# Altium PCB Skayboard.PcbDoc (part 1 of 3)
Units mil, origin at the board's own origin, x right, y up, seen from the top; angles counter-clockwise.
Board outline 13972.57 x 4222.54 mil, 2 copper layers (Top Layer, Bottom Layer); 328 components, 109 nets, 864 pads, 207 vias.
Unrouted connection lines stored in the file: 225.
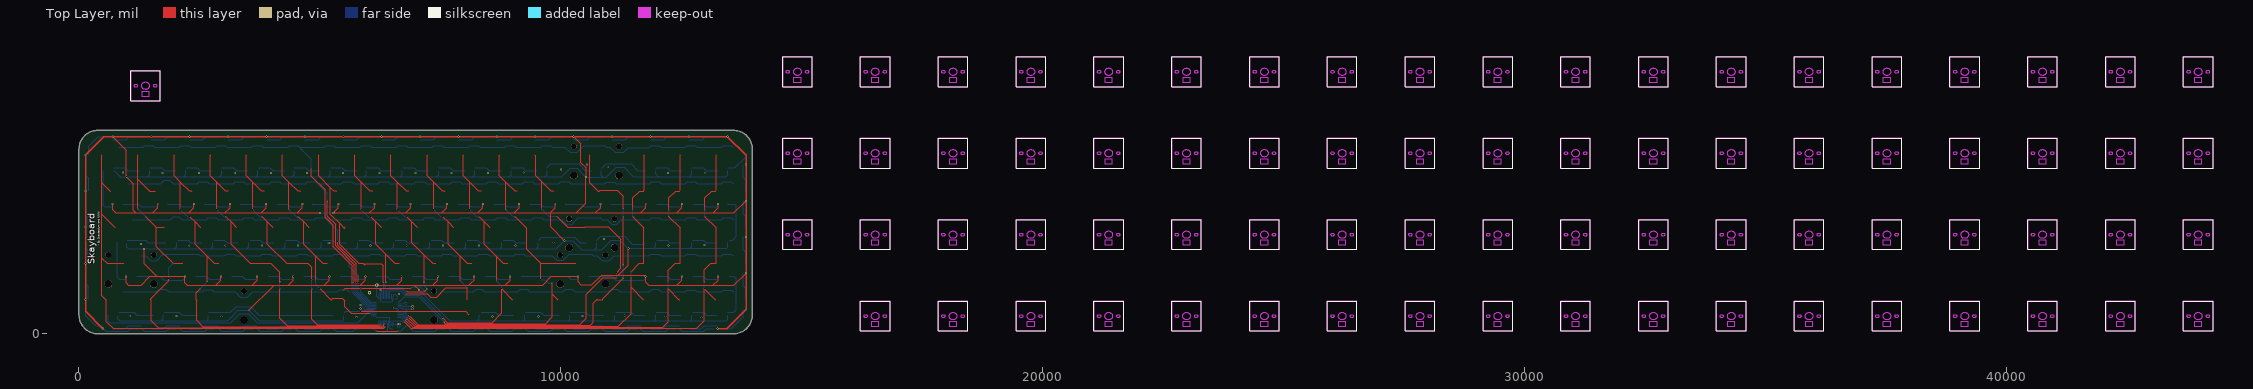
[diagram p0: Top Layer view]
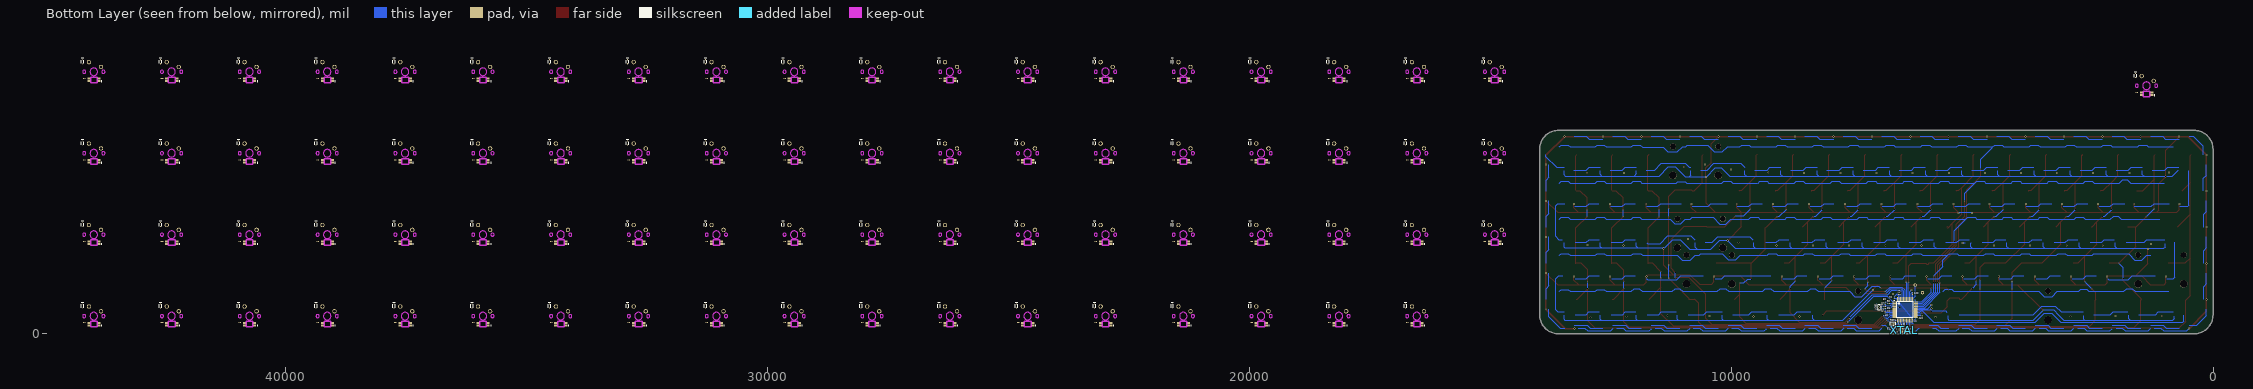
[diagram p1: Bottom Layer view, seen from below]

## Layer stack, top to bottom
Top Solder: solder mask 0.4, Solder Resist, Dk 3.5
Top Layer: signal copper 1.4
Dielectric 1: dielectric 12.6, FR-4, Dk 4.8
Bottom Layer: signal copper 1.4
Bottom Solder: solder mask 0.4, Solder Resist, Dk 3.5

## Board outline
58.09,188.06 42.95,215.02 30.04,243.12 19.35,272.1 10.94,301.83 4.92,332.15 1.29,362.86 0.04,393.78 0.09,3828.78 1.29,3859.71 4.92,3890.42 10.94,3920.74 19.35,3950.47 30.04,3979.52 42.95,4007.55 58.09,4034.52 75.23,4060.23 94.38,4084.52 115.38,4107.2 138.06,4128.22 162.37,4147.36 188.08,4164.52 215.04,4179.64 243.09,4192.55 272.12,4203.26 301.85,4211.65 332.18,4217.67 362.89,4221.33 393.81,4222.55 13578.87,4222.51 13609.73,4221.33 13640.44,4217.67 13670.75,4211.65 13700.52,4203.26 13729.5,4192.55 13757.57,4179.64 13784.53,4164.52 13810.24,4147.36 13834.5,4128.22 13857.25,4107.2 13878.24,4084.52 13897.33,4060.23 13914.53,4034.52 13929.69,4007.55 13942.61,3979.52 13953.31,3950.47 13961.62,3920.74 13967.76,3890.42 13971.35,3859.71 13972.61,3828.78 13972.61,393.78 13971.35,362.86 13967.76,332.15 13961.62,301.83 13953.31,272.1 13942.61,243.12 13929.69,215.02 13914.53,188.06 13897.33,162.34 13878.24,138.09 13857.25,115.36 13834.5,94.36 13810.24,75.21 13784.53,58.06 13757.57,42.93 13729.5,30.02 13700.52,19.33 13670.75,10.92 13640.44,4.9 13609.73,1.26 13578.87,0.01 393.81,0.07 362.89,1.26 332.18,4.9 301.85,10.92 272.12,19.33 243.09,30.02 215.04,42.93 188.08,58.06 162.37,75.21 138.06,94.36 115.38,115.36 94.38,138.09 75.23,162.34

## Design rules (kind name [scope] priority, off if disabled: settings)
BoardOutlineClearance [All] p1: gap=10 ignorepadtopadclearanceinfootprint=FALSE except(-1: Arc-OutlineEdge; 0: Arc-SplitContinuation Track-SplitContinuation SMDPad-SplitContinuation THPad-SplitContinuation Via-SplitContinuation Fill-SplitContinuation Poly-SplitContinuation Region-SplitContinuation Text-SplitContinuation)
Clearance [All] p1: gap=10 ignorepadtopadclearanceinfootprint=FALSE except(0: Arc-Hole Track-Hole SMDPad-Hole THPad-Hole Via-Hole Fill-Hole Poly-Hole Region-Hole Text-Hole)
HoleSize [All] p1: absolutevalues=TRUE maxlimit=600 minlimit=5 maxpercent=80.000 minpercent=20.000
PolygonConnect [All] p1: connectstyle=Relief reliefconductorwidth=10 reliefentries=4 polygonreliefangle="90 Angle" airgapwidth=10
RoomDefinition SKEY1 [InComponentClass('SKEY1')] p1: confinementstyle=ConfineIn formatcopy=TRUE lockcomponents=FALSE outline 1054.6,4824.66 1709.53,4824.66 1709.53,5477.24 1054.6,5477.24
RoomDefinition SKEY2 [InComponentClass('SKEY2')] p2: confinementstyle=ConfineIn formatcopy=TRUE lockcomponents=FALSE outline 16195.45,44.44 16850.38,44.44 16850.38,697.02 16195.45,697.02
RoomDefinition SKEY3 [InComponentClass('SKEY3')] p3: confinementstyle=ConfineIn formatcopy=TRUE lockcomponents=FALSE outline 17810.15,44.44 18465.07,44.44 18465.07,697.02 17810.15,697.02
RoomDefinition SKEY4 [InComponentClass('SKEY4')] p4: confinementstyle=ConfineIn formatcopy=TRUE lockcomponents=FALSE outline 19424.84,44.44 20079.77,44.44 20079.77,697.02 19424.84,697.02
RoomDefinition SKEY5 [InComponentClass('SKEY5')] p5: confinementstyle=ConfineIn formatcopy=TRUE lockcomponents=FALSE outline 21039.53,44.44 21694.46,44.44 21694.46,697.02 21039.53,697.02
RoomDefinition SKEY6 [InComponentClass('SKEY6')] p6: confinementstyle=ConfineIn formatcopy=TRUE lockcomponents=FALSE outline 22654.23,44.44 23309.15,44.44 23309.15,697.02 22654.23,697.02
RoomDefinition SKEY7 [InComponentClass('SKEY7')] p7: confinementstyle=ConfineIn formatcopy=TRUE lockcomponents=FALSE outline 24268.92,44.44 24923.85,44.44 24923.85,697.02 24268.92,697.02
RoomDefinition SKEY8 [InComponentClass('SKEY8')] p8: confinementstyle=ConfineIn formatcopy=TRUE lockcomponents=FALSE outline 25883.62,44.44 26538.54,44.44 26538.54,697.02 25883.62,697.02
RoomDefinition SKEY9 [InComponentClass('SKEY9')] p9: confinementstyle=ConfineIn formatcopy=TRUE lockcomponents=FALSE outline 27498.31,44.44 28153.24,44.44 28153.24,697.02 27498.31,697.02
RoomDefinition SKEY10 [InComponentClass('SKEY10')] p10: confinementstyle=ConfineIn formatcopy=TRUE lockcomponents=FALSE outline 29113,44.44 29767.93,44.44 29767.93,697.02 29113,697.02
RoomDefinition SKEY11 [InComponentClass('SKEY11')] p11: confinementstyle=ConfineIn formatcopy=TRUE lockcomponents=FALSE outline 30727.7,44.44 31382.62,44.44 31382.62,697.02 30727.7,697.02
RoomDefinition SKEY12 [InComponentClass('SKEY12')] p12: confinementstyle=ConfineIn formatcopy=TRUE lockcomponents=FALSE outline 32342.39,44.44 32997.32,44.44 32997.32,697.02 32342.39,697.02
RoomDefinition SKEY13 [InComponentClass('SKEY13')] p13: confinementstyle=ConfineIn formatcopy=TRUE lockcomponents=FALSE outline 33957.08,44.44 34612.01,44.44 34612.01,697.02 33957.08,697.02
RoomDefinition SKEY14 [InComponentClass('SKEY14')] p14: confinementstyle=ConfineIn formatcopy=TRUE lockcomponents=FALSE outline 35571.78,44.44 36226.7,44.44 36226.7,697.02 35571.78,697.02
RoomDefinition SKEY15 [InComponentClass('SKEY15')] p15: confinementstyle=ConfineIn formatcopy=TRUE lockcomponents=FALSE outline 37186.47,44.44 37841.4,44.44 37841.4,697.02 37186.47,697.02
RoomDefinition SKEY16 [InComponentClass('SKEY16')] p16: confinementstyle=ConfineIn formatcopy=TRUE lockcomponents=FALSE outline 38801.16,44.44 39456.09,44.44 39456.09,697.02 38801.16,697.02
RoomDefinition SKEY17 [InComponentClass('SKEY17')] p17: confinementstyle=ConfineIn formatcopy=TRUE lockcomponents=FALSE outline 40415.86,44.44 41070.78,44.44 41070.78,697.02 40415.86,697.02
RoomDefinition SKEY18 [InComponentClass('SKEY18')] p18: confinementstyle=ConfineIn formatcopy=TRUE lockcomponents=FALSE outline 42030.55,44.44 42685.48,44.44 42685.48,697.02 42030.55,697.02
RoomDefinition SKEY19 [InComponentClass('SKEY19')] p19: confinementstyle=ConfineIn formatcopy=TRUE lockcomponents=FALSE outline 43645.25,44.44 44300.17,44.44 44300.17,697.02 43645.25,697.02
RoomDefinition SKEY20 [InComponentClass('SKEY20')] p20: confinementstyle=ConfineIn formatcopy=TRUE lockcomponents=FALSE outline 14580.76,1734.39 15235.69,1734.39 15235.69,2386.97 14580.76,2386.97
RoomDefinition SKEY21 [InComponentClass('SKEY21')] p21: confinementstyle=ConfineIn formatcopy=TRUE lockcomponents=FALSE outline 16195.45,1734.39 16850.38,1734.39 16850.38,2386.97 16195.45,2386.97
RoomDefinition SKEY22 [InComponentClass('SKEY22')] p22: confinementstyle=ConfineIn formatcopy=TRUE lockcomponents=FALSE outline 17810.15,1734.39 18465.07,1734.39 18465.07,2386.97 17810.15,2386.97
RoomDefinition SKEY23 [InComponentClass('SKEY23')] p23: confinementstyle=ConfineIn formatcopy=TRUE lockcomponents=FALSE outline 19424.84,1734.39 20079.77,1734.39 20079.77,2386.97 19424.84,2386.97
RoomDefinition SKEY24 [InComponentClass('SKEY24')] p24: confinementstyle=ConfineIn formatcopy=TRUE lockcomponents=FALSE outline 21039.53,1734.39 21694.46,1734.39 21694.46,2386.97 21039.53,2386.97
RoomDefinition SKEY25 [InComponentClass('SKEY25')] p25: confinementstyle=ConfineIn formatcopy=TRUE lockcomponents=FALSE outline 22654.23,1734.39 23309.15,1734.39 23309.15,2386.97 22654.23,2386.97
RoomDefinition SKEY26 [InComponentClass('SKEY26')] p26: confinementstyle=ConfineIn formatcopy=TRUE lockcomponents=FALSE outline 24268.92,1734.39 24923.85,1734.39 24923.85,2386.97 24268.92,2386.97
RoomDefinition SKEY27 [InComponentClass('SKEY27')] p27: confinementstyle=ConfineIn formatcopy=TRUE lockcomponents=FALSE outline 25883.62,1734.39 26538.54,1734.39 26538.54,2386.97 25883.62,2386.97
RoomDefinition SKEY28 [InComponentClass('SKEY28')] p28: confinementstyle=ConfineIn formatcopy=TRUE lockcomponents=FALSE outline 27498.31,1734.39 28153.24,1734.39 28153.24,2386.97 27498.31,2386.97
RoomDefinition SKEY29 [InComponentClass('SKEY29')] p29: confinementstyle=ConfineIn formatcopy=TRUE lockcomponents=FALSE outline 29113,1734.39 29767.93,1734.39 29767.93,2386.97 29113,2386.97
RoomDefinition SKEY30 [InComponentClass('SKEY30')] p30: confinementstyle=ConfineIn formatcopy=TRUE lockcomponents=FALSE outline 30727.7,1734.39 31382.62,1734.39 31382.62,2386.97 30727.7,2386.97
RoomDefinition SKEY31 [InComponentClass('SKEY31')] p31: confinementstyle=ConfineIn formatcopy=TRUE lockcomponents=FALSE outline 32342.39,1734.39 32997.32,1734.39 32997.32,2386.97 32342.39,2386.97
RoomDefinition SKEY32 [InComponentClass('SKEY32')] p32: confinementstyle=ConfineIn formatcopy=TRUE lockcomponents=FALSE outline 33957.08,1734.39 34612.01,1734.39 34612.01,2386.97 33957.08,2386.97
RoomDefinition SKEY33 [InComponentClass('SKEY33')] p33: confinementstyle=ConfineIn formatcopy=TRUE lockcomponents=FALSE outline 35571.78,1734.39 36226.7,1734.39 36226.7,2386.97 35571.78,2386.97
RoomDefinition SKEY34 [InComponentClass('SKEY34')] p34: confinementstyle=ConfineIn formatcopy=TRUE lockcomponents=FALSE outline 37186.47,1734.39 37841.4,1734.39 37841.4,2386.97 37186.47,2386.97
RoomDefinition SKEY35 [InComponentClass('SKEY35')] p35: confinementstyle=ConfineIn formatcopy=TRUE lockcomponents=FALSE outline 38801.16,1734.39 39456.09,1734.39 39456.09,2386.97 38801.16,2386.97
RoomDefinition SKEY36 [InComponentClass('SKEY36')] p36: confinementstyle=ConfineIn formatcopy=TRUE lockcomponents=FALSE outline 40415.86,1734.39 41070.78,1734.39 41070.78,2386.97 40415.86,2386.97
RoomDefinition SKEY37 [InComponentClass('SKEY37')] p37: confinementstyle=ConfineIn formatcopy=TRUE lockcomponents=FALSE outline 42030.55,1734.39 42685.48,1734.39 42685.48,2386.97 42030.55,2386.97
RoomDefinition SKEY38 [InComponentClass('SKEY38')] p38: confinementstyle=ConfineIn formatcopy=TRUE lockcomponents=FALSE outline 43645.25,1734.39 44300.17,1734.39 44300.17,2386.97 43645.25,2386.97
RoomDefinition SKEY39 [InComponentClass('SKEY39')] p39: confinementstyle=ConfineIn formatcopy=TRUE lockcomponents=FALSE outline 14580.76,3424.34 15235.69,3424.34 15235.69,4076.92 14580.76,4076.92
RoomDefinition SKEY40 [InComponentClass('SKEY40')] p40: confinementstyle=ConfineIn formatcopy=TRUE lockcomponents=FALSE outline 16195.45,3424.34 16850.38,3424.34 16850.38,4076.92 16195.45,4076.92
RoomDefinition SKEY41 [InComponentClass('SKEY41')] p41: confinementstyle=ConfineIn formatcopy=TRUE lockcomponents=FALSE outline 17810.15,3424.34 18465.07,3424.34 18465.07,4076.92 17810.15,4076.92
RoomDefinition SKEY42 [InComponentClass('SKEY42')] p42: confinementstyle=ConfineIn formatcopy=TRUE lockcomponents=FALSE outline 19424.84,3424.34 20079.77,3424.34 20079.77,4076.92 19424.84,4076.92
RoomDefinition SKEY43 [InComponentClass('SKEY43')] p43: confinementstyle=ConfineIn formatcopy=TRUE lockcomponents=FALSE outline 21039.53,3424.34 21694.46,3424.34 21694.46,4076.92 21039.53,4076.92
RoomDefinition SKEY44 [InComponentClass('SKEY44')] p44: confinementstyle=ConfineIn formatcopy=TRUE lockcomponents=FALSE outline 22654.23,3424.34 23309.15,3424.34 23309.15,4076.92 22654.23,4076.92
RoomDefinition SKEY45 [InComponentClass('SKEY45')] p45: confinementstyle=ConfineIn formatcopy=TRUE lockcomponents=FALSE outline 24268.92,3424.34 24923.85,3424.34 24923.85,4076.92 24268.92,4076.92
RoomDefinition SKEY46 [InComponentClass('SKEY46')] p46: confinementstyle=ConfineIn formatcopy=TRUE lockcomponents=FALSE outline 25883.62,3424.34 26538.54,3424.34 26538.54,4076.92 25883.62,4076.92
RoomDefinition SKEY47 [InComponentClass('SKEY47')] p47: confinementstyle=ConfineIn formatcopy=TRUE lockcomponents=FALSE outline 27498.31,3424.34 28153.24,3424.34 28153.24,4076.92 27498.31,4076.92
RoomDefinition SKEY48 [InComponentClass('SKEY48')] p48: confinementstyle=ConfineIn formatcopy=TRUE lockcomponents=FALSE outline 29113,3424.34 29767.93,3424.34 29767.93,4076.92 29113,4076.92
RoomDefinition SKEY49 [InComponentClass('SKEY49')] p49: confinementstyle=ConfineIn formatcopy=TRUE lockcomponents=FALSE outline 30727.7,3424.34 31382.62,3424.34 31382.62,4076.92 30727.7,4076.92
RoomDefinition SKEY50 [InComponentClass('SKEY50')] p50: confinementstyle=ConfineIn formatcopy=TRUE lockcomponents=FALSE outline 32342.39,3424.34 32997.32,3424.34 32997.32,4076.92 32342.39,4076.92
RoomDefinition SKEY51 [InComponentClass('SKEY51')] p51: confinementstyle=ConfineIn formatcopy=TRUE lockcomponents=FALSE outline 33957.08,3424.34 34612.01,3424.34 34612.01,4076.92 33957.08,4076.92
RoomDefinition SKEY52 [InComponentClass('SKEY52')] p52: confinementstyle=ConfineIn formatcopy=TRUE lockcomponents=FALSE outline 35571.78,3424.34 36226.7,3424.34 36226.7,4076.92 35571.78,4076.92
RoomDefinition SKEY53 [InComponentClass('SKEY53')] p53: confinementstyle=ConfineIn formatcopy=TRUE lockcomponents=FALSE outline 37186.47,3424.34 37841.4,3424.34 37841.4,4076.92 37186.47,4076.92
RoomDefinition SKEY54 [InComponentClass('SKEY54')] p54: confinementstyle=ConfineIn formatcopy=TRUE lockcomponents=FALSE outline 38801.16,3424.34 39456.09,3424.34 39456.09,4076.92 38801.16,4076.92
RoomDefinition SKEY55 [InComponentClass('SKEY55')] p55: confinementstyle=ConfineIn formatcopy=TRUE lockcomponents=FALSE outline 40415.86,3424.34 41070.78,3424.34 41070.78,4076.92 40415.86,4076.92
RoomDefinition SKEY56 [InComponentClass('SKEY56')] p56: confinementstyle=ConfineIn formatcopy=TRUE lockcomponents=FALSE outline 42030.55,3424.34 42685.48,3424.34 42685.48,4076.92 42030.55,4076.92
RoomDefinition SKEY57 [InComponentClass('SKEY57')] p57: confinementstyle=ConfineIn formatcopy=TRUE lockcomponents=FALSE outline 43645.25,3424.34 44300.17,3424.34 44300.17,4076.92 43645.25,4076.92
RoomDefinition SKEY58 [InComponentClass('SKEY58')] p58: confinementstyle=ConfineIn formatcopy=TRUE lockcomponents=FALSE outline 14580.76,5114.29 15235.69,5114.29 15235.69,5766.87 14580.76,5766.87
RoomDefinition SKEY59 [InComponentClass('SKEY59')] p59: confinementstyle=ConfineIn formatcopy=TRUE lockcomponents=FALSE outline 16195.45,5114.29 16850.38,5114.29 16850.38,5766.87 16195.45,5766.87
RoomDefinition SKEY60 [InComponentClass('SKEY60')] p60: confinementstyle=ConfineIn formatcopy=TRUE lockcomponents=FALSE outline 17810.15,5114.29 18465.07,5114.29 18465.07,5766.87 17810.15,5766.87
RoomDefinition SKEY61 [InComponentClass('SKEY61')] p61: confinementstyle=ConfineIn formatcopy=TRUE lockcomponents=FALSE outline 19424.84,5114.29 20079.77,5114.29 20079.77,5766.87 19424.84,5766.87
RoomDefinition SKEY62 [InComponentClass('SKEY62')] p62: confinementstyle=ConfineIn formatcopy=TRUE lockcomponents=FALSE outline 21039.53,5114.29 21694.46,5114.29 21694.46,5766.87 21039.53,5766.87
RoomDefinition SKEY63 [InComponentClass('SKEY63')] p63: confinementstyle=ConfineIn formatcopy=TRUE lockcomponents=FALSE outline 22654.23,5114.29 23309.15,5114.29 23309.15,5766.87 22654.23,5766.87
RoomDefinition SKEY64 [InComponentClass('SKEY64')] p64: confinementstyle=ConfineIn formatcopy=TRUE lockcomponents=FALSE outline 24268.92,5114.29 24923.85,5114.29 24923.85,5766.87 24268.92,5766.87
RoomDefinition SKEY65 [InComponentClass('SKEY65')] p65: confinementstyle=ConfineIn formatcopy=TRUE lockcomponents=FALSE outline 25883.62,5114.29 26538.54,5114.29 26538.54,5766.87 25883.62,5766.87
RoomDefinition SKEY66 [InComponentClass('SKEY66')] p66: confinementstyle=ConfineIn formatcopy=TRUE lockcomponents=FALSE outline 27498.31,5114.29 28153.24,5114.29 28153.24,5766.87 27498.31,5766.87
RoomDefinition SKEY67 [InComponentClass('SKEY67')] p67: confinementstyle=ConfineIn formatcopy=TRUE lockcomponents=FALSE outline 29113,5114.29 29767.93,5114.29 29767.93,5766.87 29113,5766.87
RoomDefinition SKEY68 [InComponentClass('SKEY68')] p68: confinementstyle=ConfineIn formatcopy=TRUE lockcomponents=FALSE outline 30727.7,5114.29 31382.62,5114.29 31382.62,5766.87 30727.7,5766.87
RoomDefinition SKEY69 [InComponentClass('SKEY69')] p69: confinementstyle=ConfineIn formatcopy=TRUE lockcomponents=FALSE outline 32342.39,5114.29 32997.32,5114.29 32997.32,5766.87 32342.39,5766.87
RoomDefinition SKEY70 [InComponentClass('SKEY70')] p70: confinementstyle=ConfineIn formatcopy=TRUE lockcomponents=FALSE outline 33957.08,5114.29 34612.01,5114.29 34612.01,5766.87 33957.08,5766.87
RoomDefinition SKEY71 [InComponentClass('SKEY71')] p71: confinementstyle=ConfineIn formatcopy=TRUE lockcomponents=FALSE outline 35571.78,5114.29 36226.7,5114.29 36226.7,5766.87 35571.78,5766.87
RoomDefinition SKEY72 [InComponentClass('SKEY72')] p72: confinementstyle=ConfineIn formatcopy=TRUE lockcomponents=FALSE outline 37186.47,5114.29 37841.4,5114.29 37841.4,5766.87 37186.47,5766.87
RoomDefinition SKEY73 [InComponentClass('SKEY73')] p73: confinementstyle=ConfineIn formatcopy=TRUE lockcomponents=FALSE outline 38801.16,5114.29 39456.09,5114.29 39456.09,5766.87 38801.16,5766.87
RoomDefinition SKEY74 [InComponentClass('SKEY74')] p74: confinementstyle=ConfineIn formatcopy=TRUE lockcomponents=FALSE outline 40415.86,5114.29 41070.78,5114.29 41070.78,5766.87 40415.86,5766.87
RoomDefinition SKEY75 [InComponentClass('SKEY75')] p75: confinementstyle=ConfineIn formatcopy=TRUE lockcomponents=FALSE outline 42030.55,5114.29 42685.48,5114.29 42685.48,5766.87 42030.55,5766.87
RoomDefinition SKEY76 [InComponentClass('SKEY76')] p76: confinementstyle=ConfineIn formatcopy=TRUE lockcomponents=FALSE outline 43645.25,5114.29 44300.17,5114.29 44300.17,5766.87 43645.25,5766.87
RoutingVias [All] p1: holewidth=12 width=24 viastyle="Through Hole" minholewidth=12 minwidth=24 maxholewidth=28 maxwidth=50
SolderMaskExpansion [All] p1: expansion=4 istentingtop=FALSE
UnRoutedNet [All] p1: checkbadconnections=TRUE
Width [All] p1: maxlimit=100 minlimit=5 preferedwidth=7.5 minimp=50.000000 maximp=50.000000 favimp=50.000000
28 further rules are at their usual default settings.

## Classes and differential pairs
channel class SK6812: SKEY1 SKEY2 SKEY3 SKEY4 SKEY5 SKEY6 SKEY7 SKEY8 SKEY9 SKEY10 SKEY11 SKEY12 SKEY13 SKEY14 SKEY15 SKEY16 SKEY17 SKEY18 SKEY19 SKEY20 SKEY21 SKEY22 SKEY23 SKEY24 SKEY25 SKEY26 SKEY27 SKEY28 SKEY29 SKEY30 SKEY31 SKEY32 SKEY33 SKEY34 SKEY35 SKEY36 SKEY37 SKEY38 SKEY39 SKEY40 SKEY41 SKEY42 SKEY43 SKEY44 SKEY45 SKEY46 SKEY47 SKEY48 SKEY49 SKEY50 SKEY51 SKEY52 SKEY53 SKEY54 SKEY55 SKEY56 SKEY57 SKEY58 SKEY59 SKEY60 SKEY61 SKEY62 SKEY63 SKEY64 SKEY65 SKEY66 SKEY67 SKEY68 SKEY69 SKEY70 SKEY71 SKEY72 SKEY73 SKEY74 SKEY75 SKEY76
channel class Key: SKEY1 SKEY2 SKEY3 SKEY4 SKEY5 SKEY6 SKEY7 SKEY8 SKEY9 SKEY10 SKEY11 SKEY12 SKEY13 SKEY14 SKEY15 SKEY16 SKEY17 SKEY18 SKEY19 SKEY20 SKEY21 SKEY22 SKEY23 SKEY24 SKEY25 SKEY26 SKEY27 SKEY28 SKEY29 SKEY30 SKEY31 SKEY32 SKEY33 SKEY34 SKEY35 SKEY36 SKEY37 SKEY38 SKEY39 SKEY40 SKEY41 SKEY42 SKEY43 SKEY44 SKEY45 SKEY46 SKEY47 SKEY48 SKEY49 SKEY50 SKEY51 SKEY52 SKEY53 SKEY54 SKEY55 SKEY56 SKEY57 SKEY58 SKEY59 SKEY60 SKEY61 SKEY62 SKEY63 SKEY64 SKEY65 SKEY66 SKEY67 SKEY68 SKEY69 SKEY70 SKEY71 SKEY72 SKEY73 SKEY74 SKEY75 SKEY76
component class Skayboard: *1 C2 C3 C4 C5 C6 C7 C8 C9 C10 c11 C12 C13 R1 R2 R3 RST1 U1 USB1 X1 XTAL

## Components (designator, comment, footprint, x,y, rotation, side; value= is the part's Value field where it differs from the comment)
C1 "100nF" CAPC1005X55X30LL05T10 44170.15,5299.57 r0 bottom
C1 "100nF" CAPC1005X55X30LL05T10 42555.46,5299.57 r0 bottom
C1 "100nF" CAPC1005X55X30LL05T10 40940.77,5299.57 r0 bottom
C1 "100nF" CAPC1005X55X30LL05T10 39326.07,5299.57 r0 bottom
C1 "100nF" CAPC1005X55X30LL05T10 37711.38,5299.57 r0 bottom
C1 "100nF" CAPC1005X55X30LL05T10 36096.69,5299.57 r0 bottom
C1 "100nF" CAPC1005X55X30LL05T10 34481.99,5299.57 r0 bottom
C1 "100nF" CAPC1005X55X30LL05T10 32867.3,5299.57 r0 bottom
C1 "100nF" CAPC1005X55X30LL05T10 31252.61,5299.57 r0 bottom
C1 "100nF" CAPC1005X55X30LL05T10 29637.91,5299.57 r0 bottom
C1 "100nF" CAPC1005X55X30LL05T10 28023.22,5299.57 r0 bottom
C1 "100nF" CAPC1005X55X30LL05T10 26408.53,5299.57 r0 bottom
C1 "100nF" CAPC1005X55X30LL05T10 24793.83,5299.57 r0 bottom
C1 "100nF" CAPC1005X55X30LL05T10 23179.14,5299.57 r0 bottom
C1 "100nF" CAPC1005X55X30LL05T10 21564.44,5299.57 r0 bottom
C1 "100nF" CAPC1005X55X30LL05T10 19949.75,5299.57 r0 bottom
C1 "100nF" CAPC1005X55X30LL05T10 18335.06,5299.57 r0 bottom
C1 "100nF" CAPC1005X55X30LL05T10 16720.36,5299.57 r0 bottom
C1 "100nF" CAPC1005X55X30LL05T10 15105.67,5299.57 r0 bottom
C1 "100nF" CAPC1005X55X30LL05T10 44170.15,3609.62 r0 bottom
C1 "100nF" CAPC1005X55X30LL05T10 42555.46,3609.62 r0 bottom
C1 "100nF" CAPC1005X55X30LL05T10 40940.77,3609.62 r0 bottom
C1 "100nF" CAPC1005X55X30LL05T10 39326.07,3609.62 r0 bottom
C1 "100nF" CAPC1005X55X30LL05T10 37711.38,3609.62 r0 bottom
C1 "100nF" CAPC1005X55X30LL05T10 36096.69,3609.62 r0 bottom
C1 "100nF" CAPC1005X55X30LL05T10 34481.99,3609.62 r0 bottom
C1 "100nF" CAPC1005X55X30LL05T10 32867.3,3609.62 r0 bottom
C1 "100nF" CAPC1005X55X30LL05T10 31252.61,3609.62 r0 bottom
C1 "100nF" CAPC1005X55X30LL05T10 29637.91,3609.62 r0 bottom
C1 "100nF" CAPC1005X55X30LL05T10 28023.22,3609.62 r0 bottom
C1 "100nF" CAPC1005X55X30LL05T10 26408.53,3609.62 r0 bottom
C1 "100nF" CAPC1005X55X30LL05T10 24793.83,3609.62 r0 bottom
C1 "100nF" CAPC1005X55X30LL05T10 23179.14,3609.62 r0 bottom
C1 "100nF" CAPC1005X55X30LL05T10 21564.44,3609.62 r0 bottom
C1 "100nF" CAPC1005X55X30LL05T10 19949.75,3609.62 r0 bottom
C1 "100nF" CAPC1005X55X30LL05T10 18335.06,3609.62 r0 bottom
C1 "100nF" CAPC1005X55X30LL05T10 16720.36,3609.62 r0 bottom
C1 "100nF" CAPC1005X55X30LL05T10 15105.67,3609.62 r0 bottom
C1 "100nF" CAPC1005X55X30LL05T10 44170.15,1919.67 r0 bottom
C1 "100nF" CAPC1005X55X30LL05T10 42555.46,1919.67 r0 bottom
C1 "100nF" CAPC1005X55X30LL05T10 40940.77,1919.67 r0 bottom
C1 "100nF" CAPC1005X55X30LL05T10 39326.07,1919.67 r0 bottom
C1 "100nF" CAPC1005X55X30LL05T10 37711.38,1919.67 r0 bottom
C1 "100nF" CAPC1005X55X30LL05T10 36096.69,1919.67 r0 bottom
C1 "100nF" CAPC1005X55X30LL05T10 34481.99,1919.67 r0 bottom
C1 "100nF" CAPC1005X55X30LL05T10 32867.3,1919.67 r0 bottom
C1 "100nF" CAPC1005X55X30LL05T10 31252.61,1919.67 r0 bottom
C1 "100nF" CAPC1005X55X30LL05T10 29637.91,1919.67 r0 bottom
C1 "100nF" CAPC1005X55X30LL05T10 28023.22,1919.67 r0 bottom
C1 "100nF" CAPC1005X55X30LL05T10 26408.53,1919.67 r0 bottom
C1 "100nF" CAPC1005X55X30LL05T10 24793.83,1919.67 r0 bottom
C1 "100nF" CAPC1005X55X30LL05T10 23179.14,1919.67 r0 bottom
C1 "100nF" CAPC1005X55X30LL05T10 21564.44,1919.67 r0 bottom
C1 "100nF" CAPC1005X55X30LL05T10 19949.75,1919.67 r0 bottom
C1 "100nF" CAPC1005X55X30LL05T10 18335.06,1919.67 r0 bottom
C1 "100nF" CAPC1005X55X30LL05T10 16720.36,1919.67 r0 bottom
C1 "100nF" CAPC1005X55X30LL05T10 15105.67,1919.67 r0 bottom
C1 "100nF" CAPC1005X55X30LL05T10 44170.15,229.72 r0 bottom
C1 "100nF" CAPC1005X55X30LL05T10 42555.46,229.72 r0 bottom
C1 "100nF" CAPC1005X55X30LL05T10 40940.77,229.72 r0 bottom
C1 "100nF" CAPC1005X55X30LL05T10 39326.07,229.72 r0 bottom
C1 "100nF" CAPC1005X55X30LL05T10 37711.38,229.72 r0 bottom
C1 "100nF" CAPC1005X55X30LL05T10 36096.69,229.72 r0 bottom
C1 "100nF" CAPC1005X55X30LL05T10 34481.99,229.72 r0 bottom
C1 "100nF" CAPC1005X55X30LL05T10 32867.3,229.72 r0 bottom
C1 "100nF" CAPC1005X55X30LL05T10 31252.61,229.72 r0 bottom
C1 "100nF" CAPC1005X55X30LL05T10 29637.91,229.72 r0 bottom
C1 "100nF" CAPC1005X55X30LL05T10 28023.22,229.72 r0 bottom
C1 "100nF" CAPC1005X55X30LL05T10 26408.53,229.72 r0 bottom
C1 "100nF" CAPC1005X55X30LL05T10 24793.83,229.72 r0 bottom
C1 "100nF" CAPC1005X55X30LL05T10 23179.14,229.72 r0 bottom
C1 "100nF" CAPC1005X55X30LL05T10 21564.44,229.72 r0 bottom
C1 "100nF" CAPC1005X55X30LL05T10 19949.75,229.72 r0 bottom
C1 "100nF" CAPC1005X55X30LL05T10 18335.06,229.72 r0 bottom
C1 "100nF" CAPC1005X55X30LL05T10 16720.36,229.72 r0 bottom
C1 "100nF" CAPC1005X55X30LL05T10 1579.51,5009.94 r0 bottom
C2 "100nF" CAPC1005X55X30LL05T10 6507.87,818.9 r180 bottom
C3 "47pF" CAPC1005X55X25LL05T10 6803.15,637.8 r90 bottom
C4 "47pF" CAPC1005X55X25LL05T10 6803.15,449.61 r90 bottom
C5 "22pF" CAPC1005X56X25NL10T15 6509.25,88.88 r90 bottom
C6 "22pF" CAPC1005X56X25NL10T15 6287.4,43.31 r0 bottom
C7 "100nF" CAPC1005X55X30LL05T10 6614.17,751.97 r90 bottom
C8 "100nF" CAPC1005X55X30LL05T10 6724.41,625.98 r0 bottom
C9 "100nF" CAPC1005X55X30LL05T10 6724.41,468.5 r0 bottom
C10 "100nF" CAPC1005X55X30LL05T10 6465.89,183.31 r270 bottom
C11 "100nF" CAPC1005X55X30LL05T10 6047.24,374.02 r180 bottom
C12 "100nF" CAPC1005X55X30LL05T10 6232.28,834.65 r90 bottom
C13 "100nF" CAPC1005X55X30LL05T10 6629.05,137.54 r180 bottom
D1 "1N4148WS" DIOD-SOD323-2-A_V 44200.29,5645.28 r90 bottom
D1 "1N4148WS" DIOD-SOD323-2-A_V 42585.6,5645.28 r90 bottom
D1 "1N4148WS" DIOD-SOD323-2-A_V 40970.91,5645.28 r90 bottom
D1 "1N4148WS" DIOD-SOD323-2-A_V 39356.21,5645.28 r90 bottom
D1 "1N4148WS" DIOD-SOD323-2-A_V 37741.52,5645.28 r90 bottom
D1 "1N4148WS" DIOD-SOD323-2-A_V 36126.83,5645.28 r90 bottom
D1 "1N4148WS" DIOD-SOD323-2-A_V 34512.13,5645.28 r90 bottom
D1 "1N4148WS" DIOD-SOD323-2-A_V 32897.44,5645.28 r90 bottom
D1 "1N4148WS" DIOD-SOD323-2-A_V 31282.74,5645.28 r90 bottom
D1 "1N4148WS" DIOD-SOD323-2-A_V 29668.05,5645.28 r90 bottom
D1 "1N4148WS" DIOD-SOD323-2-A_V 28053.36,5645.28 r90 bottom
D1 "1N4148WS" DIOD-SOD323-2-A_V 26438.66,5645.28 r90 bottom
D1 "1N4148WS" DIOD-SOD323-2-A_V 24823.97,5645.28 r90 bottom
D1 "1N4148WS" DIOD-SOD323-2-A_V 23209.28,5645.28 r90 bottom
D1 "1N4148WS" DIOD-SOD323-2-A_V 21594.58,5645.28 r90 bottom
D1 "1N4148WS" DIOD-SOD323-2-A_V 19979.89,5645.28 r90 bottom
D1 "1N4148WS" DIOD-SOD323-2-A_V 18365.2,5645.28 r90 bottom
D1 "1N4148WS" DIOD-SOD323-2-A_V 16750.5,5645.28 r90 bottom
D1 "1N4148WS" DIOD-SOD323-2-A_V 15135.81,5645.28 r90 bottom
D1 "1N4148WS" DIOD-SOD323-2-A_V 44200.29,3955.33 r90 bottom
D1 "1N4148WS" DIOD-SOD323-2-A_V 42585.6,3955.33 r90 bottom
D1 "1N4148WS" DIOD-SOD323-2-A_V 40970.91,3955.33 r90 bottom
D1 "1N4148WS" DIOD-SOD323-2-A_V 39356.21,3955.33 r90 bottom
D1 "1N4148WS" DIOD-SOD323-2-A_V 37741.52,3955.33 r90 bottom
D1 "1N4148WS" DIOD-SOD323-2-A_V 36126.83,3955.33 r90 bottom
D1 "1N4148WS" DIOD-SOD323-2-A_V 34512.13,3955.33 r90 bottom
D1 "1N4148WS" DIOD-SOD323-2-A_V 32897.44,3955.33 r90 bottom
D1 "1N4148WS" DIOD-SOD323-2-A_V 31282.74,3955.33 r90 bottom
D1 "1N4148WS" DIOD-SOD323-2-A_V 29668.05,3955.33 r90 bottom
D1 "1N4148WS" DIOD-SOD323-2-A_V 28053.36,3955.33 r90 bottom
D1 "1N4148WS" DIOD-SOD323-2-A_V 26438.66,3955.33 r90 bottom
D1 "1N4148WS" DIOD-SOD323-2-A_V 24823.97,3955.33 r90 bottom
D1 "1N4148WS" DIOD-SOD323-2-A_V 23209.28,3955.33 r90 bottom
D1 "1N4148WS" DIOD-SOD323-2-A_V 21594.58,3955.33 r90 bottom
D1 "1N4148WS" DIOD-SOD323-2-A_V 19979.89,3955.33 r90 bottom
D1 "1N4148WS" DIOD-SOD323-2-A_V 18365.2,3955.33 r90 bottom
D1 "1N4148WS" DIOD-SOD323-2-A_V 16750.5,3955.33 r90 bottom
D1 "1N4148WS" DIOD-SOD323-2-A_V 15135.81,3955.33 r90 bottom
D1 "1N4148WS" DIOD-SOD323-2-A_V 44200.29,2265.38 r90 bottom
D1 "1N4148WS" DIOD-SOD323-2-A_V 42585.6,2265.38 r90 bottom
D1 "1N4148WS" DIOD-SOD323-2-A_V 40970.91,2265.38 r90 bottom
D1 "1N4148WS" DIOD-SOD323-2-A_V 39356.21,2265.38 r90 bottom
D1 "1N4148WS" DIOD-SOD323-2-A_V 37741.52,2265.38 r90 bottom
D1 "1N4148WS" DIOD-SOD323-2-A_V 36126.83,2265.38 r90 bottom
D1 "1N4148WS" DIOD-SOD323-2-A_V 34512.13,2265.38 r90 bottom
D1 "1N4148WS" DIOD-SOD323-2-A_V 32897.44,2265.38 r90 bottom
D1 "1N4148WS" DIOD-SOD323-2-A_V 31282.74,2265.38 r90 bottom
D1 "1N4148WS" DIOD-SOD323-2-A_V 29668.05,2265.38 r90 bottom
D1 "1N4148WS" DIOD-SOD323-2-A_V 28053.36,2265.38 r90 bottom
D1 "1N4148WS" DIOD-SOD323-2-A_V 26438.66,2265.38 r90 bottom
D1 "1N4148WS" DIOD-SOD323-2-A_V 24823.97,2265.38 r90 bottom
D1 "1N4148WS" DIOD-SOD323-2-A_V 23209.28,2265.38 r90 bottom
D1 "1N4148WS" DIOD-SOD323-2-A_V 21594.58,2265.38 r90 bottom
D1 "1N4148WS" DIOD-SOD323-2-A_V 19979.89,2265.38 r90 bottom
D1 "1N4148WS" DIOD-SOD323-2-A_V 18365.2,2265.38 r90 bottom
D1 "1N4148WS" DIOD-SOD323-2-A_V 16750.5,2265.38 r90 bottom
D1 "1N4148WS" DIOD-SOD323-2-A_V 15135.81,2265.38 r90 bottom
D1 "1N4148WS" DIOD-SOD323-2-A_V 44200.29,575.43 r90 bottom
D1 "1N4148WS" DIOD-SOD323-2-A_V 42585.6,575.43 r90 bottom
D1 "1N4148WS" DIOD-SOD323-2-A_V 40970.91,575.43 r90 bottom
D1 "1N4148WS" DIOD-SOD323-2-A_V 39356.21,575.43 r90 bottom
D1 "1N4148WS" DIOD-SOD323-2-A_V 37741.52,575.43 r90 bottom
D1 "1N4148WS" DIOD-SOD323-2-A_V 36126.83,575.43 r90 bottom
D1 "1N4148WS" DIOD-SOD323-2-A_V 34512.13,575.43 r90 bottom
D1 "1N4148WS" DIOD-SOD323-2-A_V 32897.44,575.43 r90 bottom
D1 "1N4148WS" DIOD-SOD323-2-A_V 31282.74,575.43 r90 bottom
D1 "1N4148WS" DIOD-SOD323-2-A_V 29668.05,575.43 r90 bottom
D1 "1N4148WS" DIOD-SOD323-2-A_V 28053.36,575.43 r90 bottom
D1 "1N4148WS" DIOD-SOD323-2-A_V 26438.66,575.43 r90 bottom
D1 "1N4148WS" DIOD-SOD323-2-A_V 24823.97,575.43 r90 bottom
D1 "1N4148WS" DIOD-SOD323-2-A_V 23209.28,575.43 r90 bottom
D1 "1N4148WS" DIOD-SOD323-2-A_V 21594.58,575.43 r90 bottom
D1 "1N4148WS" DIOD-SOD323-2-A_V 19979.89,575.43 r90 bottom
D1 "1N4148WS" DIOD-SOD323-2-A_V 18365.2,575.43 r90 bottom
D1 "1N4148WS" DIOD-SOD323-2-A_V 16750.5,575.43 r90 bottom
D1 "1N4148WS" DIOD-SOD323-2-A_V 1609.65,5355.65 r90 bottom
MX "CMX" MX 43971.03,5436.76 r0 top
MX "CMX" MX 42356.34,5436.76 r0 top
MX "CMX" MX 40741.65,5436.76 r0 top
MX "CMX" MX 39126.95,5436.76 r0 top
MX "CMX" MX 37512.26,5436.76 r0 top
MX "CMX" MX 35897.57,5436.76 r0 top
MX "CMX" MX 34282.87,5436.76 r0 top
MX "CMX" MX 32668.18,5436.76 r0 top
MX "CMX" MX 31053.49,5436.76 r0 top
MX "CMX" MX 29438.79,5436.76 r0 top
MX "CMX" MX 27824.1,5436.76 r0 top
MX "CMX" MX 26209.41,5436.76 r0 top
MX "CMX" MX 24594.71,5436.76 r0 top
MX "CMX" MX 22980.02,5436.76 r0 top
MX "CMX" MX 21365.32,5436.76 r0 top
MX "CMX" MX 19750.63,5436.76 r0 top
MX "CMX" MX 18135.94,5436.76 r0 top
MX "CMX" MX 16521.24,5436.76 r0 top
MX "CMX" MX 14906.55,5436.76 r0 top
MX "CMX" MX 43971.03,3746.81 r0 top
MX "CMX" MX 42356.34,3746.81 r0 top
MX "CMX" MX 40741.65,3746.81 r0 top
MX "CMX" MX 39126.95,3746.81 r0 top
MX "CMX" MX 37512.26,3746.81 r0 top
MX "CMX" MX 35897.57,3746.81 r0 top
MX "CMX" MX 34282.87,3746.81 r0 top
MX "CMX" MX 32668.18,3746.81 r0 top
MX "CMX" MX 31053.49,3746.81 r0 top
MX "CMX" MX 29438.79,3746.81 r0 top
MX "CMX" MX 27824.1,3746.81 r0 top
MX "CMX" MX 26209.41,3746.81 r0 top
MX "CMX" MX 24594.71,3746.81 r0 top
MX "CMX" MX 22980.02,3746.81 r0 top
MX "CMX" MX 21365.32,3746.81 r0 top
MX "CMX" MX 19750.63,3746.81 r0 top
MX "CMX" MX 18135.94,3746.81 r0 top
MX "CMX" MX 16521.24,3746.81 r0 top
MX "CMX" MX 14906.55,3746.81 r0 top
MX "CMX" MX 43971.03,2056.86 r0 top
MX "CMX" MX 42356.34,2056.86 r0 top
MX "CMX" MX 40741.65,2056.86 r0 top
MX "CMX" MX 39126.95,2056.86 r0 top
MX "CMX" MX 37512.26,2056.86 r0 top
MX "CMX" MX 35897.57,2056.86 r0 top
MX "CMX" MX 34282.87,2056.86 r0 top
MX "CMX" MX 32668.18,2056.86 r0 top
MX "CMX" MX 31053.49,2056.86 r0 top
MX "CMX" MX 29438.79,2056.86 r0 top
MX "CMX" MX 27824.1,2056.86 r0 top
MX "CMX" MX 26209.41,2056.86 r0 top
MX "CMX" MX 24594.71,2056.86 r0 top
MX "CMX" MX 22980.02,2056.86 r0 top
MX "CMX" MX 21365.32,2056.86 r0 top
MX "CMX" MX 19750.63,2056.86 r0 top
MX "CMX" MX 18135.94,2056.86 r0 top
MX "CMX" MX 16521.24,2056.86 r0 top
MX "CMX" MX 14906.55,2056.86 r0 top
MX "CMX" MX 43971.03,366.91 r0 top
MX "CMX" MX 42356.34,366.91 r0 top
MX "CMX" MX 40741.65,366.91 r0 top
MX "CMX" MX 39126.95,366.91 r0 top
MX "CMX" MX 37512.26,366.91 r0 top
MX "CMX" MX 35897.57,366.91 r0 top
MX "CMX" MX 34282.87,366.91 r0 top
MX "CMX" MX 32668.18,366.91 r0 top
MX "CMX" MX 31053.49,366.91 r0 top
MX "CMX" MX 29438.79,366.91 r0 top
MX "CMX" MX 27824.1,366.91 r0 top
MX "CMX" MX 26209.41,366.91 r0 top
MX "CMX" MX 24594.71,366.91 r0 top
MX "CMX" MX 22980.02,366.91 r0 top
MX "CMX" MX 21365.32,366.91 r0 top
MX "CMX" MX 19750.63,366.91 r0 top
MX "CMX" MX 18135.94,366.91 r0 top
MX "CMX" MX 16521.24,366.91 r0 top
MX "CMX" MX 1380.39,5147.13 r0 top
R1 "22R" RESC1005X40X25LL05T05 6811.02,566.93 r0 bottom
R2 "22R" RESC1005X40X25LL05T05 6811.02,523.62 r0 bottom
R3 "10K" RESC1005X40X25NL05T05 6527.56,181.1 r90 bottom
RST1 "MHDR1X2" MHDR1X2 6615.35,200.79 r0 bottom
SKLED "SK6812ME" SK6812ME 43967.57,5269.93 r180 bottom
SKLED "SK6812ME" SK6812ME 42352.88,5269.93 r180 bottom
SKLED "SK6812ME" SK6812ME 40738.18,5269.93 r180 bottom
SKLED "SK6812ME" SK6812ME 39123.49,5269.93 r180 bottom
SKLED "SK6812ME" SK6812ME 37508.8,5269.93 r180 bottom
SKLED "SK6812ME" SK6812ME 35894.1,5269.93 r180 bottom
SKLED "SK6812ME" SK6812ME 34279.41,5269.93 r180 bottom
SKLED "SK6812ME" SK6812ME 32664.72,5269.93 r180 bottom
SKLED "SK6812ME" SK6812ME 31050.02,5269.93 r180 bottom
SKLED "SK6812ME" SK6812ME 29435.33,5269.93 r180 bottom
SKLED "SK6812ME" SK6812ME 27820.63,5269.93 r180 bottom
SKLED "SK6812ME" SK6812ME 26205.94,5269.93 r180 bottom
SKLED "SK6812ME" SK6812ME 24591.25,5269.93 r180 bottom
SKLED "SK6812ME" SK6812ME 22976.55,5269.93 r180 bottom
SKLED "SK6812ME" SK6812ME 21361.86,5269.93 r180 bottom
SKLED "SK6812ME" SK6812ME 19747.17,5269.93 r180 bottom
SKLED "SK6812ME" SK6812ME 18132.47,5269.93 r180 bottom
SKLED "SK6812ME" SK6812ME 16517.78,5269.93 r180 bottom
SKLED "SK6812ME" SK6812ME 14903.09,5269.93 r180 bottom
SKLED "SK6812ME" SK6812ME 43967.57,3579.98 r180 bottom
SKLED "SK6812ME" SK6812ME 42352.88,3579.98 r180 bottom
SKLED "SK6812ME" SK6812ME 40738.18,3579.98 r180 bottom
SKLED "SK6812ME" SK6812ME 39123.49,3579.98 r180 bottom
SKLED "SK6812ME" SK6812ME 37508.8,3579.98 r180 bottom
SKLED "SK6812ME" SK6812ME 35894.1,3579.98 r180 bottom
SKLED "SK6812ME" SK6812ME 34279.41,3579.98 r180 bottom
SKLED "SK6812ME" SK6812ME 32664.72,3579.98 r180 bottom
SKLED "SK6812ME" SK6812ME 31050.02,3579.98 r180 bottom
SKLED "SK6812ME" SK6812ME 29435.33,3579.98 r180 bottom
SKLED "SK6812ME" SK6812ME 27820.63,3579.98 r180 bottom
SKLED "SK6812ME" SK6812ME 26205.94,3579.98 r180 bottom
SKLED "SK6812ME" SK6812ME 24591.25,3579.98 r180 bottom
SKLED "SK6812ME" SK6812ME 22976.55,3579.98 r180 bottom
SKLED "SK6812ME" SK6812ME 21361.86,3579.98 r180 bottom
SKLED "SK6812ME" SK6812ME 19747.17,3579.98 r180 bottom
SKLED "SK6812ME" SK6812ME 18132.47,3579.98 r180 bottom
SKLED "SK6812ME" SK6812ME 16517.78,3579.98 r180 bottom
SKLED "SK6812ME" SK6812ME 14903.09,3579.98 r180 bottom
SKLED "SK6812ME" SK6812ME 43967.57,1890.03 r180 bottom
SKLED "SK6812ME" SK6812ME 42352.88,1890.03 r180 bottom
SKLED "SK6812ME" SK6812ME 40738.18,1890.03 r180 bottom
SKLED "SK6812ME" SK6812ME 39123.49,1890.03 r180 bottom
SKLED "SK6812ME" SK6812ME 37508.8,1890.03 r180 bottom
SKLED "SK6812ME" SK6812ME 35894.1,1890.03 r180 bottom
SKLED "SK6812ME" SK6812ME 34279.41,1890.03 r180 bottom
SKLED "SK6812ME" SK6812ME 32664.72,1890.03 r180 bottom
SKLED "SK6812ME" SK6812ME 31050.02,1890.03 r180 bottom
SKLED "SK6812ME" SK6812ME 29435.33,1890.03 r180 bottom
SKLED "SK6812ME" SK6812ME 27820.63,1890.03 r180 bottom
SKLED "SK6812ME" SK6812ME 26205.94,1890.03 r180 bottom
SKLED "SK6812ME" SK6812ME 24591.25,1890.03 r180 bottom
SKLED "SK6812ME" SK6812ME 22976.55,1890.03 r180 bottom
SKLED "SK6812ME" SK6812ME 21361.86,1890.03 r180 bottom
SKLED "SK6812ME" SK6812ME 19747.17,1890.03 r180 bottom
SKLED "SK6812ME" SK6812ME 18132.47,1890.03 r180 bottom
SKLED "SK6812ME" SK6812ME 16517.78,1890.03 r180 bottom
SKLED "SK6812ME" SK6812ME 14903.09,1890.03 r180 bottom
SKLED "SK6812ME" SK6812ME 43967.57,200.08 r180 bottom
SKLED "SK6812ME" SK6812ME 42352.88,200.08 r180 bottom
SKLED "SK6812ME" SK6812ME 40738.18,200.08 r180 bottom
SKLED "SK6812ME" SK6812ME 39123.49,200.08 r180 bottom
SKLED "SK6812ME" SK6812ME 37508.8,200.08 r180 bottom
SKLED "SK6812ME" SK6812ME 35894.1,200.08 r180 bottom
SKLED "SK6812ME" SK6812ME 34279.41,200.08 r180 bottom
SKLED "SK6812ME" SK6812ME 32664.72,200.08 r180 bottom
SKLED "SK6812ME" SK6812ME 31050.02,200.08 r180 bottom
SKLED "SK6812ME" SK6812ME 29435.33,200.08 r180 bottom
SKLED "SK6812ME" SK6812ME 27820.63,200.08 r180 bottom
SKLED "SK6812ME" SK6812ME 26205.94,200.08 r180 bottom
SKLED "SK6812ME" SK6812ME 24591.25,200.08 r180 bottom
SKLED "SK6812ME" SK6812ME 22976.55,200.08 r180 bottom
SKLED "SK6812ME" SK6812ME 21361.86,200.08 r180 bottom
SKLED "SK6812ME" SK6812ME 19747.17,200.08 r180 bottom
SKLED "SK6812ME" SK6812ME 18132.47,200.08 r180 bottom
SKLED "SK6812ME" SK6812ME 16517.78,200.08 r180 bottom
SKLED "SK6812ME" SK6812ME 1376.93,4980.3 r180 bottom
U1 "ATmega32U4-AU" 44ML_M 6389.76,500 r180 bottom locked
USB1 "MHDR1X2" MHDR1X2 6921.26,519.68 r90 bottom
XTAL "16MCR" XTAL16M 6405.51,78.74 r180 bottom
? "Comment" 2USTAB 10736.33,3611.29 r0 top
? "Comment" 2USTAB 10642.53,2111.27 r0 top
? "Comment" 2USTAB 10455.05,1361.27 r0 top
? "Comment" 6.25USTAB 5392.53,611.27 r0 top locked
? "Comment" 2USTAB 1080.03,1361.26 r0 top

## Footprints (in the part's own frame and the unit in brackets; to place one, negate y for a bottom-side part, rotate by r counter-clockwise, add the part's x,y. Pads: shape width x height; smd on the part's side, far side on the other; paste and mask are expansions set on the pad)
2USTAB [mil]
  round 157 hole 157: ""(-470,-325) ""(470,-325)
  round 120 hole 120: ""(-470,275) ""(470,275)
6.25USTAB [mil]
  round 157 hole 157: ""(-1968.75,-325) ""(1968.75,-325)
  round 120 hole 120: ""(-1968.75,275) ""(1968.75,275)
44ML_M [mm] "Thin QFP, 44-Leads, Body 10x10mm, Pitch 0.8mm, IPC Low Density"
  oval 2.05x0.6 smd: 1(-5.7,4) 2(-5.7,3.2) 3(-5.7,2.4) 4(-5.7,1.6) 5(-5.7,0.8) 6(-5.7,0) 7(-5.7,-0.8) 8(-5.7,-1.6) 9(-5.7,-2.4) 10(-5.7,-3.2) 11(-5.7,-4) 23(5.7,-4) 24(5.7,-3.2) 25(5.7,-2.4) 26(5.7,-1.6) 27(5.7,-0.8) 28(5.7,0) 29(5.7,0.8) 30(5.7,1.6) 31(5.7,2.4) 32(5.7,3.2) 33(5.7,4)
  oval 0.6x2.05 smd: 12(-4,-5.7) 13(-3.2,-5.7) 14(-2.4,-5.7) 15(-1.6,-5.7) 16(-0.8,-5.7) 17(0,-5.7) 18(0.8,-5.7) 19(1.6,-5.7) 20(2.4,-5.7) 21(3.2,-5.7) 22(4,-5.7) 34(4,5.7) 35(3.2,5.7) 36(2.4,5.7) 37(1.6,5.7) 38(0.8,5.7) 39(0,5.7) 40(-0.8,5.7) 41(-1.6,5.7) 42(-2.4,5.7) 43(-3.2,5.7) 44(-4,5.7)
  silkscreen extent -5.82,-4.25 4.25,4.97, body extent -5,-5 5,5, height 1.2
CAPC1005X55X25LL05T10 [mm] "Chip Capacitor, 2-Leads, Body 1.00x0.50mm, IPC High Density"
  rect 0.56x0.52 smd: 1(-0.39,0) 2(0.39,0)
  body extent -0.53,-0.28 0.53,0.28, height 0.55
CAPC1005X55X30LL05T10 [mm] "Chip Capacitor, 2-Leads, Body 1.00x0.50mm, IPC High Density"
  rect 0.56x0.52 smd: 1(-0.38,0) 2(0.38,0)
  body extent -0.53,-0.28 0.53,0.28, height 0.55
CAPC1005X56X25NL10T15 [mm] "Chip Capacitor, 2-Leads, Body 1.00x0.50mm, IPC Medium Density"
  rect 0.68x0.64 smd: 1(-0.44,0) 2(0.44,0)
  body extent -0.55,-0.3 0.55,0.3, height 0.56
DIOD-SOD323-2-A_V [mm] "SOD-323, 2-Leads, Body 1.7x1.3mm"
  rect 0.59x0.45 smd: 1(-1.055,0) 2(1.055,0)
  silkscreen extent -0.85,-0.65 1.85,0.65, body extent -0.85,-0.65 0.85,0.65, height 1.2
MHDR1X2 [mm] "Connector; Header; 2 Position"
  rect 1x1 hole 0.6: 1(0,0)
  round 1 hole 0.6: 2(1.27,0)
  silkscreen extent -0.9,-0.9 2.17,0.9
MX [mil] "Cherry MX Footprint"
  round 0 / inner round 90 / far side round 90 hole 59: 1(100,200) 2(-150,100)
  Top Layer keep-out region: -307.09,-307.09 307.09,-307.09 307.09,307.09 -307.09,307.09
  Keep-Out Layer board cut-out: 200,33.5 212.82,30.95 223.69,23.69 230.95,12.82 233.5,0 233.5,0 230.95,-12.82 223.69,-23.69 212.82,-30.95 200,-33.5 200,-33.5 187.18,-30.95 176.31,-23.69 169.05,-12.82 166.5,0 166.5,0 169.05,12.82 176.31,23.69 187.18,30.95 200,33.5
  Keep-Out Layer board cut-out: 0,78.5 30.04,72.52 55.51,55.51 72.52,30.04 78.5,0 78.5,0 72.52,-30.04 55.51,-55.51 30.04,-72.52 0,-78.5 0,-78.5 -30.04,-72.52 -55.51,-55.51 -72.52,-30.04 -78.5,0 -78.5,0 -72.52,30.04 -55.51,55.51 -30.04,72.52 0,78.5
  Keep-Out Layer board cut-out: -200,33.5 -187.18,30.95 -176.31,23.69 -169.05,12.82 -166.5,0 -166.5,0 -169.05,-12.82 -176.31,-23.69 -187.18,-30.95 -200,-33.5 -200,-33.5 -212.82,-30.95 -223.69,-23.69 -230.95,-12.82 -233.5,0 -233.5,0 -230.95,12.82 -223.69,23.69 -212.82,30.95 -200,33.5
  silkscreen extent -307,-307 307,307
RESC1005X40X25LL05T05 [mm] "Chip Resistor, 2-Leads, Body 1.00x0.50mm, IPC High Density"
  rect 0.45x0.45 smd: 1(-0.4,0) 2(0.4,0)
  body extent -0.53,-0.27 0.53,0.28, height 0.4
RESC1005X40X25NL05T05 [mm] "Chip Resistor, 2-Leads, Body 1.00x0.50mm, IPC Medium Density"
  rect 0.55x0.55 smd: 1(-0.45,0) 2(0.45,0)
  body extent -0.53,-0.27 0.53,0.28, height 0.4
SK6812ME [mm] "SK6812 Mini-E footprint"
  rect 1.8x1 smd: 1(-2.6,0.7) 2(-2.6,-0.7) 3(2.6,-0.7) 4(2.6,0.7)
  Top Layer keep-out region: -1.75,1.45 1.75,1.45 1.75,-1.45 -1.75,-1.45
  Keep-Out Layer board cut-out: -1.75,1.45 -1.75,-1.45 1.75,-1.45 1.75,1.45
  silkscreen extent 4.2,-1.2 4.2,-0.2, body extent -3.09,-1.4 3.1,1.4, height 0.13
XTAL16M [mm] "A 16Mhz crystal resonator footprint, JLCPCB #C13738"
  rect 1.4x1.2 smd: 1(-1.1,-0.85) 2(1.1,-0.85) 3(1.1,0.85) 4(-1.1,0.85)
  silkscreen extent -0.13,-1 0.12,1